# Altium PCB PCB1.PcbDoc (part 1 of 2)
Units mm, origin at the board's own origin, x right, y up, seen from the top; angles counter-clockwise.
Board outline 100 x 100 mm, 2 copper layers (Top Layer, Bottom Layer); 110 components, 80 nets, 496 pads, 98 vias.
Unrouted connection lines stored in the file: 40.
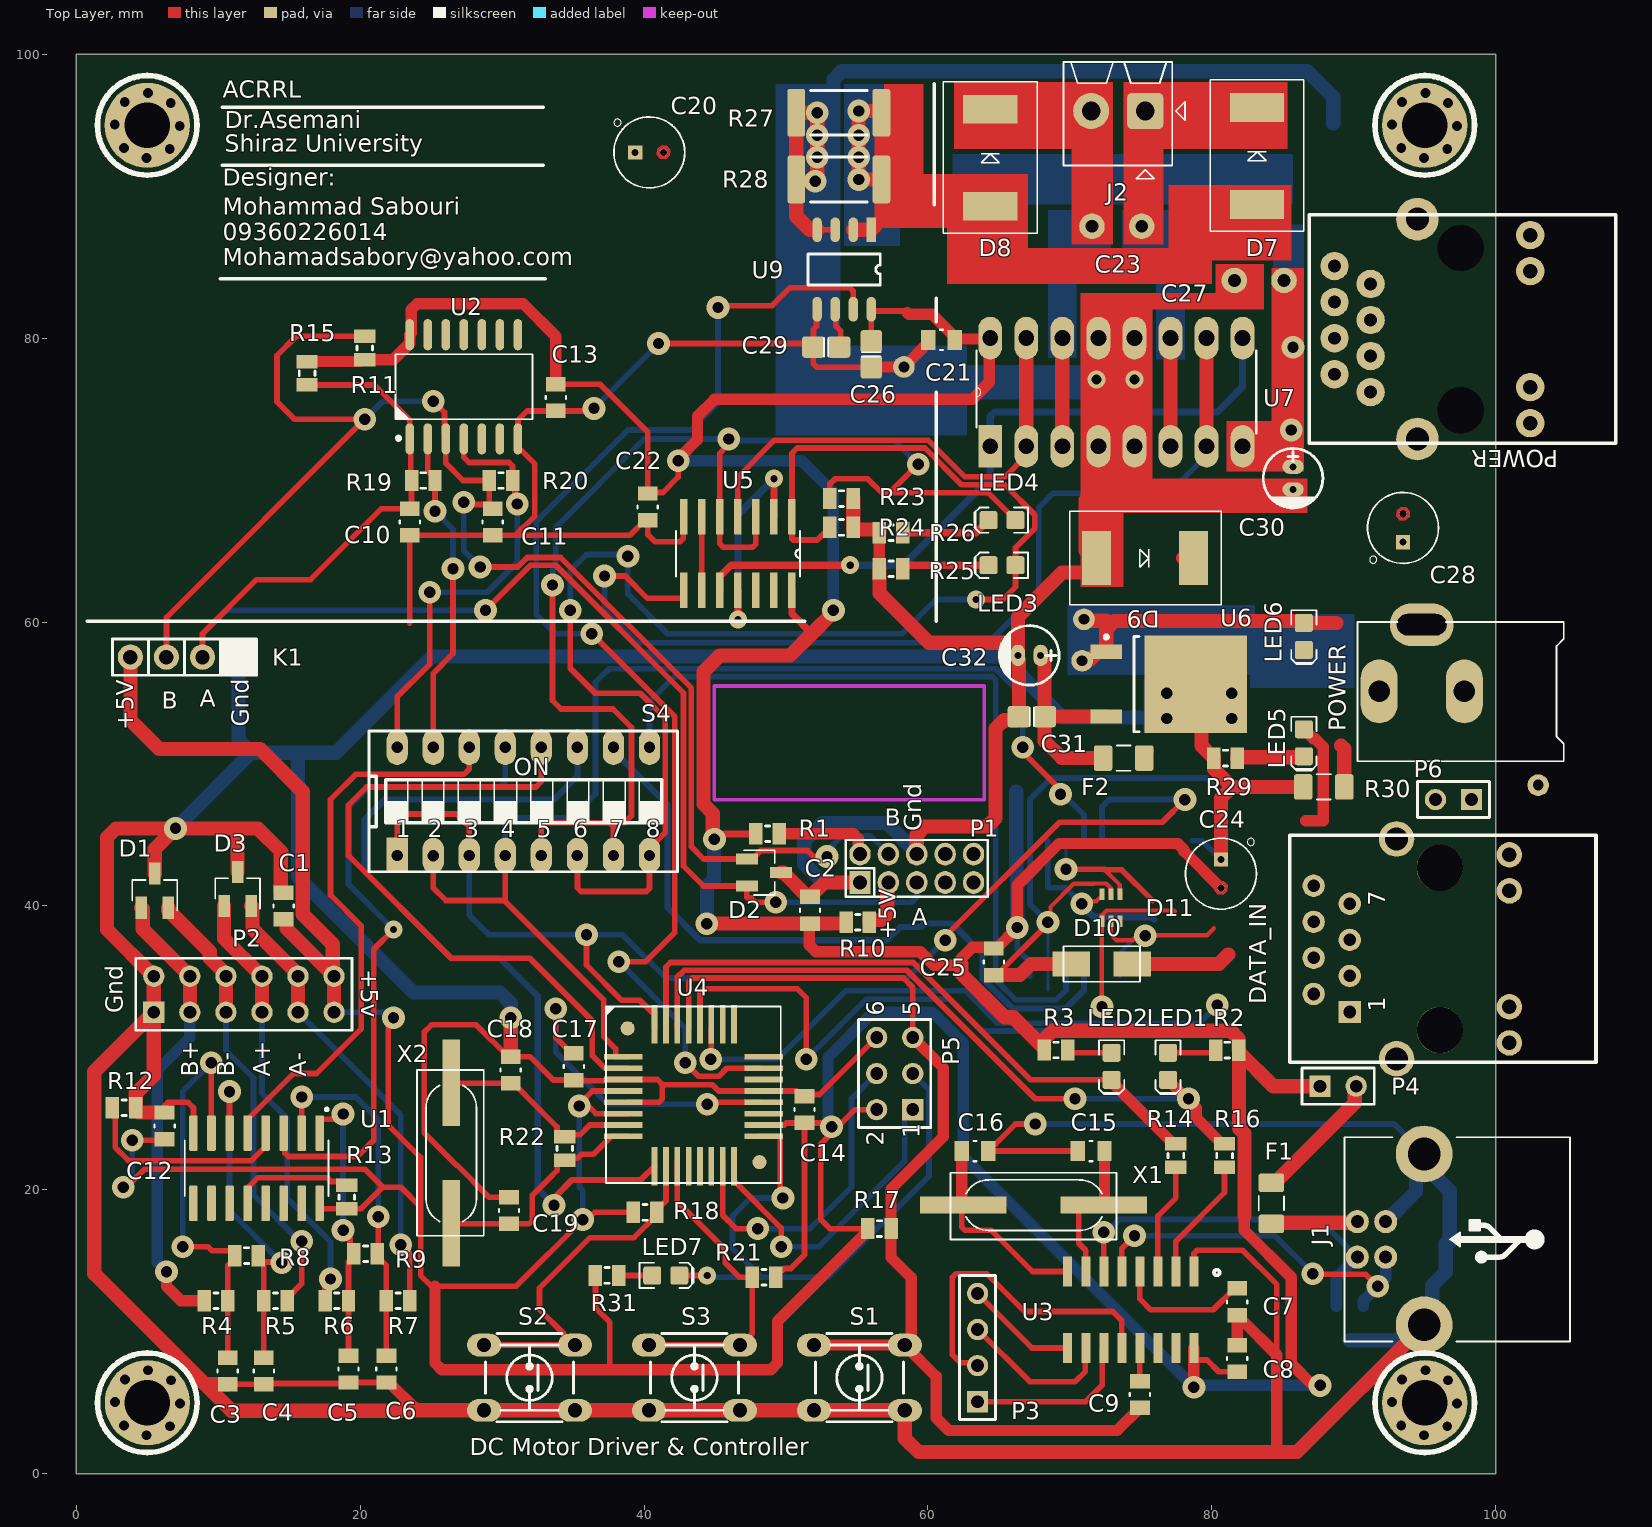
[diagram p0: Top Layer view]
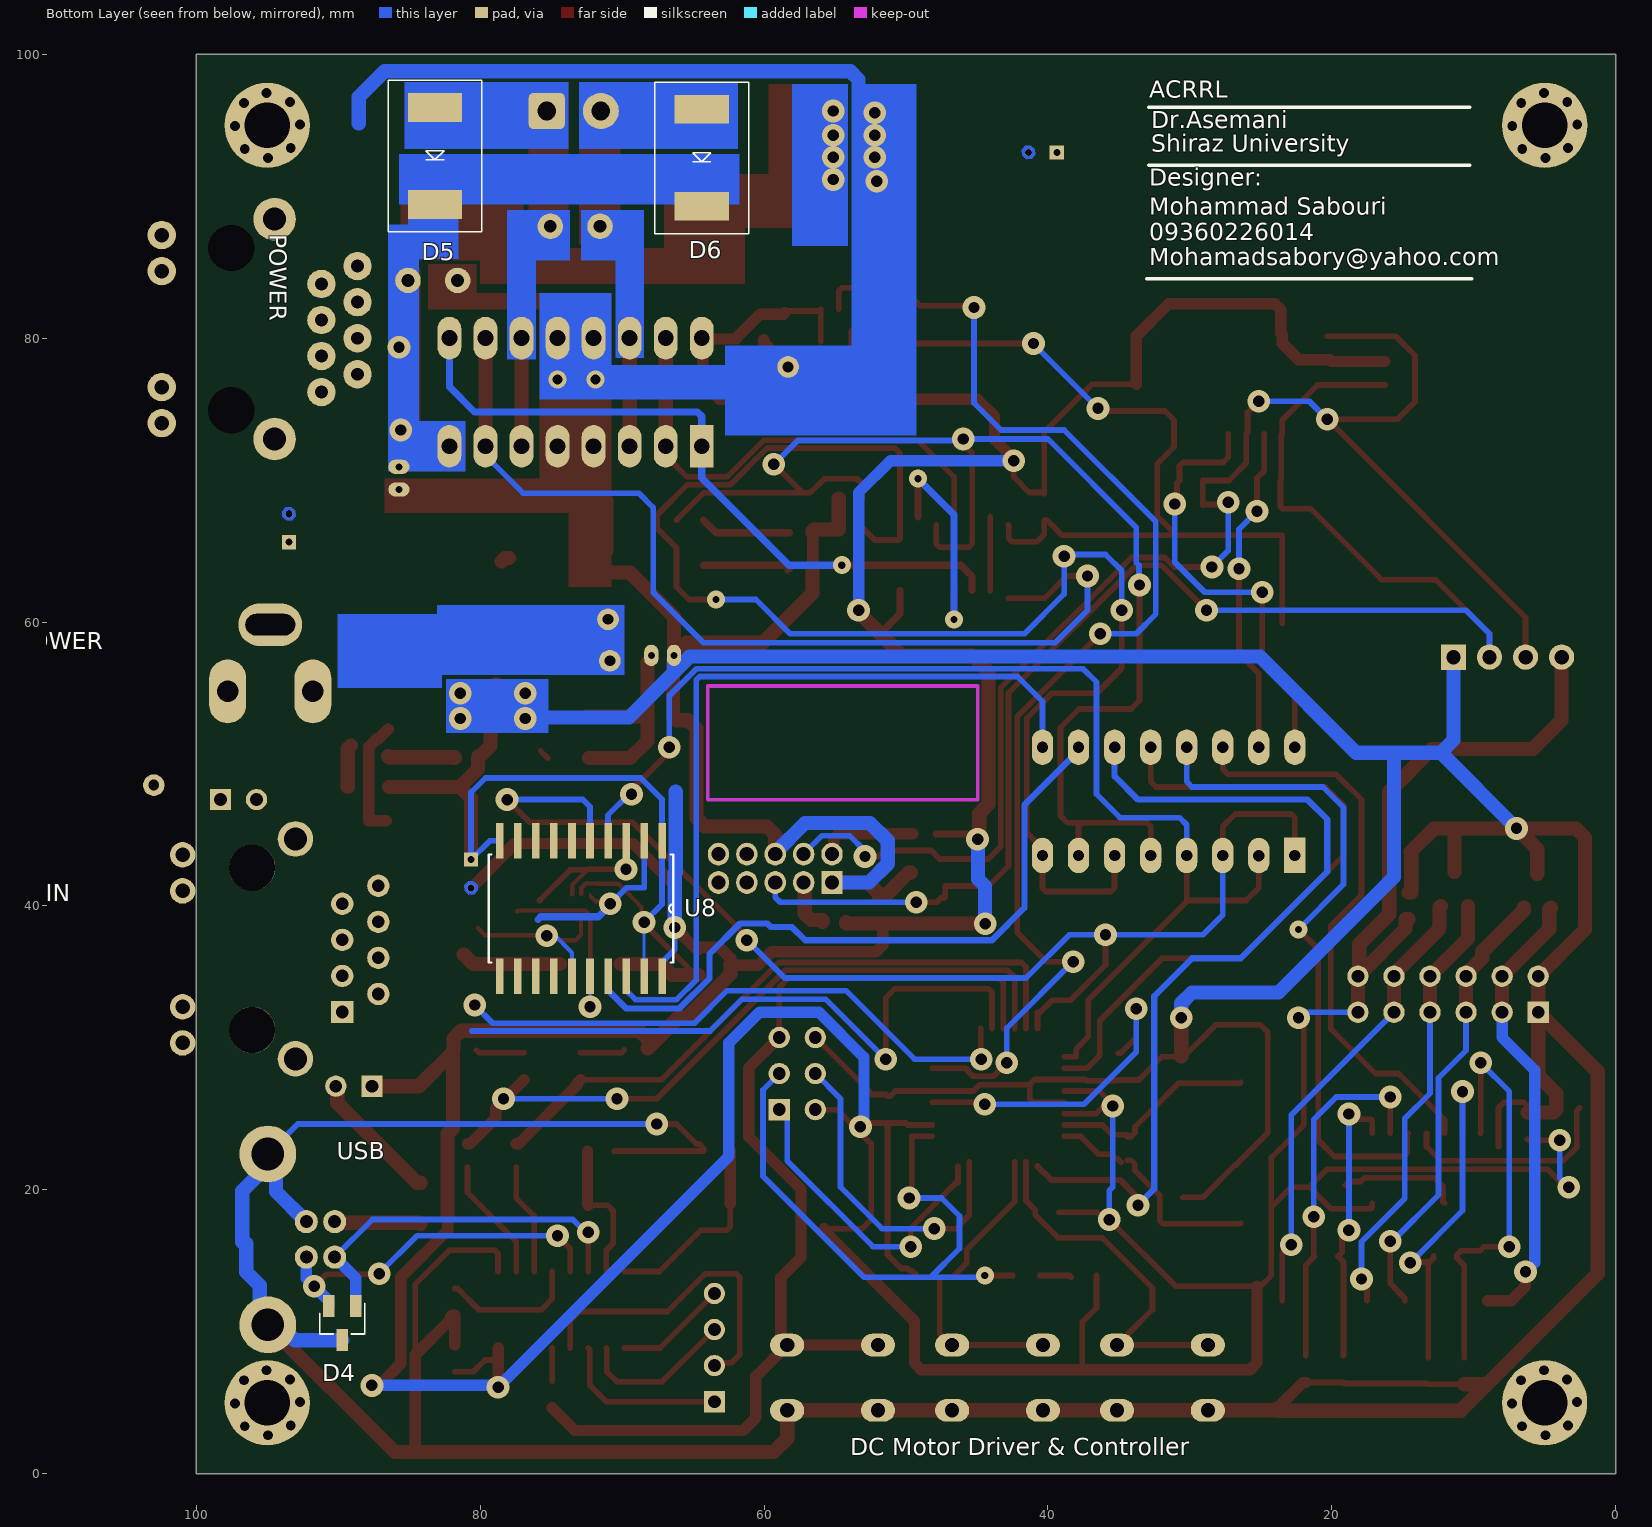
[diagram p1: Bottom Layer view, seen from below]

## Layer stack, top to bottom
Top Solder: solder mask 0.0102, Solder Resist, Dk 3.5
Top Layer: signal copper 0.0356
Dielectric 1: dielectric 0.32, FR-4, Dk 4.8
Bottom Layer: signal copper 0.0356
Bottom Solder: solder mask 0.0102, Solder Resist, Dk 3.5

## Board outline
0,0 0,100.005 100,100.005 100,0

## Design rules (kind name [scope] priority, off if disabled: settings)
Clearance [All] p1: gap=0.15 ignorepadtopadclearanceinfootprint=FALSE
PolygonConnect [All] p1: connectstyle=Relief reliefconductorwidth=0.254 reliefentries=4 polygonreliefangle="90 Angle" airgapwidth=0.254
RoutingVias [All] p1: holewidth=0.8 width=1 viastyle="Through Hole" minholewidth=0.5 minwidth=0.5 maxholewidth=1 maxwidth=1.65
SolderMaskExpansion [All] p1: expansion=0.102 istentingtop=FALSE
Width [All] p1: maxlimit=1 minlimit=0.2 preferedwidth=0.8
30 further rules are at their usual default settings.

## Components (designator, comment, footprint, x,y, rotation, side; value= is the part's Value field where it differs from the comment)
C1 "470nF 50V" 0805 14.605,40.005 r90 top value=470nF
C2 "100nF" 0805 51.689,39.7 r90 top value=470nF
C3 "22pF" 0805 10.668,7.239 r270 top value=470nF
C4 "22pF" 0805 13.208,7.239 r270 top value=470nF
C5 "22pF" 0805 19.177,7.366 r270 top value=470nF
C6 "22pF" 0805 21.844,7.366 r270 top value=470nF
C7 "100nF" 0805 81.788,12.116 r270 top value=470nF
C8 "100nF" 0805 81.788,8.128 r90 top value=470nF
C9 "100nf" 0805 74.93,5.588 r270 top value=470nF
C10 "1uF" 0805 23.495,67.056 r90 top value=470nF
C11 "1uF" 0805 29.337,67.056 r90 top value=470nF
C12 "22pF" 0805 6.223,24.511 r90 top value=470nF
C13 "100nF" 0805 33.782,75.819 r270 top value=470nF
C14 "1uF" 0805 51.308,25.654 r90 top value=470nF
C15 "22pF" 0805 71.501,22.733 r0 top value=470nF
C16 "22pF" 0805 63.322,22.733 r180 top value=470nF
C17 "100nf" 0805 35.052,28.677 r90 top value=470nF
C18 "22pF" 0805 30.607,28.448 r90 top value=470nF
C19 "22pF" 0805 30.48,18.542 r270 top value=470nF
C20 "1000u" "RADIAL - THRU 5mm" 40.37,93.091 r0 top
C21 "470nF 50V" 0805 60.96,79.883 r180 top value=470nF
C22 "22nF 50V" 0805 40.259,68.123 r270 top value=470nF
C23 "100nF" "CAP Ceramic 3.5mm" 75.057,87.884 r180 top
C24 "1000u" "RADIAL - THRU 5mm" 80.645,42.275 r270 top
C25 "470nF 50V" 0805 64.643,36.068 r90 top value=470nF
C26 "approved sub OK" CAPC2012X135N 56.007,78.867 r90 top value=0.1µ
C27 "330pF" "CAP Ceramic 3.5mm" 81.59,84.074 r0 top
C28 "1000u" "RADIAL - THRU 5mm" 93.472,66.635 r90 top
C29 "approved sub OK" CAPC2012X135N 52.832,79.375 r180 top value=1n8
C30 "0.1uF" "cap 00" 85.725,70.142 r90 top
C31 "approved sub OK" CAPC2012X135N 67.321,53.34 r180 top value=0.1µ
C32 "0.3uF" "cap 00" 67.145,57.658 r0 top
D1 "SM712" PCBComponent_1#1 4.577,39.878 r90 top
D2 "SM712" PCBComponent_1#2 47.244,41.407 r0 top
D3 "SM712" PCBComponent_1#1 10.414,40.005 r90 top
D4 "SM712" PCBComponent_1#2 90.673,11.811 r270 bottom
D5 "SMCJ120CA" DIODE-SMC 83.185,96.766 r90 bottom
D6 "SMCJ120CA" DIODE-SMC 64.389,96.639 r90 bottom
D7 "SMCJ120CA" DIODE-SMC 83.185,88.932 r270 top
D8 "SMCJ120CA" DIODE-SMC 64.389,88.805 r270 top
D9 "SMCJ120CA" DIODE-SMC 71.382,64.516 r180 top
D10 "Diode 1N5819" DO-214AC 72.248,35.918 r0 top
D11 "SMF05C.TCT" SC70-6 72.898,39.878 r180 top
DATA_IN "215877-1 RJ45" HR911105A#1 89.715,32.533 r0 top
F1 "Slow-blow" RESC3216X70N 84.201,19.05 r270 top value=500mA
F2 "Slow-blow" RESC3216X70N 73.787,50.419 r0 top value=2A
J1 "USB-B" USB_TypeB_Tyco 105.241,16.51 r180 top
J2 "Stackable ScrewTerm" 2P_PCB_ScrewTerm_90S_3.81MM 75.311,96.012 r90 top value="2 position"
K1 "Encoder_Motor" HEADER-1X4 11.43,57.531 r270 top
LED1 "TX" LED-0805-K 76.915,28.702 r270 top
LED2 "RX" LED-0805-K 72.936,28.702 r270 top
LED3 "Green" LED-0805-K 65.215,64.008 r180 top
LED4 "Green" LED-0805-K 65.215,67.183 r180 top
LED5 "Red" LED-0805-K 86.487,51.498 r270 top
LED6 "Red" LED-0805-K 86.487,58.991 r270 top
LED7 "L" LED-0805-K 41.529,13.97 r0 top
P1 "Encoder motor_AB" hhh 55.214,41.656 r0 top
P2 "Encoder" HDR2X6 5.461,32.512 r0 top
P3 "Header 4" HDR1X4 63.5,5.08 r90 top
P4 "Header 2" HDR1X2 87.63,27.305 r0 top
P5 "ISP" HDR2X3 58.928,25.654 r90 top
P6 "Header 2" HDR1X2 98.298,47.498 r180 top
POWER "CONN_PWR_JACK_2.1x5.5mm" CONN_PWR_JACK_2.1x5.5mm 105.49,55.118 r270 top value="2.1mm ID, 5.5mm OD"
POWER "215877-1 RJ45" HR911105A#2 97.536,80.645 r270 top
R1 "330" "RES 0805 (2012X06L)" 49.529,45.085 r180 top
R2 "1K" "RES 0805 (2012X06L)" 81.914,29.845 r180 top
R3 "1K" "RES 0805 (2012X06L)" 68.199,29.855 r0 top
R4 "1K" "RES 0805 (2012X06L)" 9.017,12.192 r0 top
R5 "1K" "RES 0805 (2012X06L)" 14.859,12.192 r180 top
R6 "1K" "RES 0805 (2012X06L)" 17.527,12.192 r0 top
R7 "1K" "RES 0805 (2012X06L)" 21.845,12.192 r0 top
R8 "120" "RES 0805 (2012X06L)" 12.826,15.367 r180 top
R9 "120" "RES 0805 (2012X06L)" 21.209,15.494 r180 top
R10 "120" "RES 0805 (2012X06L)" 55.879,38.862 r180 top
R11 "10K" "RES 0805 (2012X06L)" 20.32,80.136 r270 top
R12 "R0" "RES 0805 (2012X06L)" 4.19,25.781 r180 top
R13 "R0" "RES 0805 (2012X06L)" 19.05,18.669 r90 top
R14 "1K" "RES 0805 (2012X06L)" 77.47,23.241 r270 top
R15 "10K" "RES 0805 (2012X06L)" 16.256,76.708 r90 top
R16 "1K" "RES 0805 (2012X06L)" 80.899,23.241 r270 top
R17 "10K" "RES 0805 (2012X06L)" 55.753,17.272 r0 top
R18 "10K" "RES 0805 (2012X06L)" 39.243,18.415 r0 top
R19 "10K" "RES 0805 (2012X06L)" 23.622,69.977 r0 top
R20 "10K" "RES 0805 (2012X06L)" 29.083,69.977 r0 top
R21 "10K" "RES 0805 (2012X06L)" 49.275,13.843 r180 top
R22 "1M" "RES 0805 (2012X06L)" 34.417,23.748 r270 top
R23 "10K" "RES 0805 (2012X06L)" 53.087,68.707 r0 top
R24 "10K" "RES 0805 (2012X06L)" 53.086,66.675 r0 top
R25 "330" "RES 0805 (2012X06L)" 58.229,63.754 r180 top
R26 "330" "RES 0805 (2012X06L)" 58.229,66.294 r180 top
R27 "Thick Film" RESC6332X70N 53.721,95.885 r180 top value=R330
R28 "Thick Film" RESC6332X70N 53.721,91.186 r180 top value=R330
R29 "330" "RES 0805 (2012X06L)" 80.138,50.419 r0 top
R30 "Thin Film" RESC3216X70N 87.884,48.387 r180 top value=4.7K
R31 "1K" "RES 0805 (2012X06L)" 36.577,13.97 r0 top
S1 "Switch PB 4Pin" SW_PB_THT_4PIN_SPDT_6X6X7 55.172,6.769 r180 top
S2 "Switch PB 4Pin" SW_PB_THT_4PIN_SPDT_6X6X7 31.931,6.769 r180 top
S3 "Switch PB 4Pin" SW_PB_THT_4PIN_SPDT_6X6X7 43.552,6.769 r180 top
S4 "DIP8" "DIP Switch x8" 22.606,43.561 r0 top
U1 "AM26LS32ACD" SOIC127P600X175-16N 12.7,21.525 r270 top
U2 "SN74LS14DR" SOIC127P780X200-14N 27.305,76.581 r90 top
U3 "CH340G" CH340G 74.295,11.557 r180 top
U4 "ATMEGA328" QFP32 38.842,29.371 r0 top
U5 "74HC04D,653" SOIC127P600X175-14N 46.609,64.821 r270 top
U6 "L7805CD2T-TR" TO252-3M 76.967,55.626 r180 top
U7 "L293N" DIP254P762X508-16 82.169,80.01 r90 top
U8 "74HC541D" SOIC127P1032X265-20N 72.898,39.827 r270 bottom
U9 "ACS712" SOIC8 56.007,87.642 r270 top
X1 "12MC" XTAL-RU49/4 72.39,18.923 r180 top
X2 "16MC" XTAL-RU49/4 26.416,17.653 r90 top

## Footprints (in the part's own frame and the unit in brackets; to place one, negate y for a bottom-side part, rotate by r counter-clockwise, add the part's x,y. Pads: shape width x height; smd on the part's side, far side on the other; paste and mask are expansions set on the pad)
2P_PCB_ScrewTerm_90S_3.81MM [mil] "TERM BLOCK 2POS SIDE ENT STACKABLE 3.81MM"
  rrect25% 100x100 hole 52: 1(0,0)
  round 100 hole 52: 2(0,150)
  silkscreen extent -188,-110 136,226, body extent -152,-75 136,225, height 335
0805 [mil]
  rect 40x55 smd: 1(-37,0) 2(37,0)
  silkscreen extent -4,-28 4,28, body extent -47,-28 47,28, height 24
"cap 00" [mm]
  oval 1x1.5 hole 0.5: 1(0.8,0) 2(-0.8,0)
  silkscreen extent -2.1,-2.1 2.1,2.1
"CAP Ceramic 3.5mm" [mm] "Bipolar Capacitor-Design:Ali Hafizi"
  round 1.8 hole 0.9: 1(0,0) 2(3.5,0)
CAPC2012X135N [mm] "Chip Capacitor, Body 2.0x1.2mm, EIA 0805, IPC Medium Density"
  round 0.254 on Mech15: 0(0,0)
  rrect25% 1.6x1.5 smd: 1(-0.9,0) 2(0.9,0)
  Top Layer pour cut-out: -0.675,0.7 -0.475,0.9 0.475,0.9 0.675,0.7 0.675,-0.7 0.475,-0.9 -0.475,-0.9 -0.675,-0.7
  silkscreen extent -0.15,-0.65 0.15,0.65, body extent -1.1,-0.72 1.1,0.73, height 1.34
CH340G [mm]
  rect 0.635x2.1 smd: 1(-4.445,-2.695) 2(-3.175,-2.695) 3(-1.905,-2.695) 4(-0.635,-2.695) 5(0.635,-2.695) 6(1.905,-2.695) 7(3.175,-2.695) 8(4.445,-2.695) 9(4.445,2.695) 10(3.175,2.695) 11(1.905,2.695) 12(0.635,2.695) 13(-0.635,2.695) 14(-1.905,2.695) 15(-3.175,2.695) 16(-4.445,2.695)
  silkscreen extent -6.26,-2.82 -5.86,-2.42, body extent -4.97,-3.11 5.01,3.13, height 1.58
CONN_PWR_JACK_2.1x5.5mm [mm] "Power Connector, 2.1mm ID, 5.5mm OD"
  oval 4.5x2.6 hole 1.511: 1(0,-13.7) 2(0,-7.7)
  oval 3x4.5 hole 1.511 slot 3.5 at 90 deg: 3(-4.7,-10.7)
  silkscreen extent -4.9,-15.22 4.92,-0.7, body extent -4.9,-14.1 4.5,0, height 11
DIODE-SMC [mil]
  rect 80x150 smd: A(-19.69,0) K(-288.74,0)
  silkscreen extent -365,-130 55,130, body extent -309,-118 2,118, height 84
DIP254P762X508-16 [mil]
  rect 118.11x66 hole 44: 1(-300,700)
  oval 118.11x66 hole 44: 2(-300,600) 3(-300,500) 4(-300,400) 5(-300,300) 6(-300,200) 7(-300,100) 8(-300,0) 9(0,0) 10(0,100) 11(0,200) 12(0,300) 13(0,400) 14(0,500) 15(0,600) 16(0,700)
  silkscreen extent -265,-38 -35,738
"DIP Switch x8" [mm] "Switch DIP 8 way flat slide Thru-Hole-Design:Ali Hafizi"
  rect 1.5x2.5 hole 0.8: 1(0,0)
  oval 1.5x2.5 hole 0.8: 2(2.54,-0.01) 3(5.08,0) 4(7.62,0) 5(10.16,0) 6(12.7,0) 7(15.24,0) 8(17.78,0) 9(17.78,7.62) 10(15.24,7.62) 11(12.7,7.62) 12(10.16,7.62) 13(7.62,7.62) 14(5.08,7.62) 15(2.54,7.62) 16(0,7.62)
  silkscreen extent -1.98,-1.14 19.76,8.76, body extent -1.98,-1.14 19.76,8.76, height 6.35
DO-214AC [mm]
  rect 2.65x1.75 smd: A(-2.15,0) C(2.15,0)
  silkscreen extent -2.7,-1.25 2.7,1.25
HDR1X2 [mm] "Connector; Header; 2 Position"
  rect 1.5x1.5 hole 0.9: 1(0,0)
  round 1.5 hole 0.9: 2(2.54,0)
  silkscreen extent -1.27,-1.27 3.81,1.27
HDR1X4 [mm] "Connector; Header; 4 Position"
  rect 1.5x1.5 hole 0.9: 1(0,0)
  round 1.5 hole 0.9: 2(2.54,0) 3(5.08,0) 4(7.62,0)
  silkscreen extent -1.27,-1.27 8.89,1.27
HDR2X3 [mm] "Connector; Header; 3x2 Position"
  rect 1.5x1.5 hole 0.9: 1(0,0)
  round 1.5 hole 0.9: 2(0,2.54) 3(2.54,0) 4(2.54,2.54) 5(5.08,0) 6(5.08,2.54)
  silkscreen extent -1.27,-1.27 6.35,3.81
HDR2X6 [mm] "Connector; Header; 6x2 Position"
  rect 1.5x1.5 hole 0.9: 1(0,0)
  round 1.5 hole 0.9: 2(0,2.54) 3(2.54,0) 4(2.54,2.54) 5(5.08,0) 6(5.08,2.54) 7(7.62,0) 8(7.62,2.54) 9(10.16,0) 10(10.16,2.54) 11(12.7,0) 12(12.7,2.54)
  silkscreen extent -1.27,-1.27 13.97,3.81
HEADER-1X4 [mil]
  rect 70x70 hole 40: 1(0,0)
  round 70 hole 40: 2(0,-100) 3(0,-200) 4(0,-300)
  silkscreen extent -51,-350 50,50, body extent -50,-350 50,50, height 470
hhh [mm]
  rect 1.5x1.6 hole 1: 1(0,0)
  oval 1.5x1.6 hole 1: 2(0,2) 3(2,0) 4(2,2) 5(4,0) 6(4,2) 7(6,0) 8(6,2) 9(8,0) 10(8,2)
  silkscreen extent -1,-1 9,3
HR911105A#1 [mm] "HR911105A"
  rect 1.575x1.575 hole 0.889: 1(0,0)
  round 1.575 hole 0.889: 2(-2.54,1.27) 3(0,2.54) 4(-2.54,3.81) 5(0,5.08) 6(-2.54,6.35) 7(0,7.62) 8(-2.54,8.89)
  round 1.8 hole 1.02: 9(11.25,-2.18) 10(11.25,0.36) 11(11.25,8.53) 12(11.25,11.07)
  round 2.5 hole 1.63: 13(3.3,12.19) 14(3.3,-3.3)
  round 3.25 hole 3.25 unplated: C(6.35,10.16) D(6.35,-1.27)
  silkscreen extent -4.23,-3.55 17.35,12.45, body extent -4.19,-3.49 17.21,12.39, height 13.5
HR911105A#2 [mm] "Single Port RJ45 Connector with Integrated Magnetics and LED for 10/100Base-T NIC Applications"
  round 3 hole 1.63: 0(-7.745,-3.05) 0(7.745,-3.05)
  round 2 hole 0.9: 1(4.44,-6.35) 2(3.18,-8.89) 3(1.9,-6.35) 4(0.64,-8.89) 5(-0.64,-6.35) 6(-1.9,-8.89) 7(-3.18,-6.35) 8(-4.44,-8.89)
  round 2 hole 1.02: 9(6.625,4.9) 10(4.085,4.9) 11(-4.085,4.9) 12(-6.625,4.9)
  round 0 hole 3.25: 13(-5.715,0) 13(5.715,0)
  Top Layer pour cut-out: 5.715,1.8 6.404,1.663 6.988,1.273 7.378,0.689 7.515,0 7.515,0 7.378,-0.689 6.988,-1.273 6.404,-1.663 5.715,-1.8 5.715,-1.8 5.715,-1.8 5.026,-1.663 4.442,-1.273 4.052,-0.689 3.915,0 3.915,0 4.052,0.689 4.442,1.273 5.026,1.663 5.715,1.8 5.715,1.8
  Top Layer pour cut-out: -5.715,1.8 -5.026,1.663 -4.442,1.273 -4.052,0.689 -3.915,0 -3.915,0 -4.052,-0.689 -4.442,-1.273 -5.026,-1.663 -5.715,-1.8 -5.715,-1.8 -5.715,-1.8 -6.404,-1.663 -6.988,-1.273 -7.378,-0.689 -7.515,0 -7.515,0 -7.378,0.689 -6.988,1.273 -6.404,1.663 -5.715,1.8 -5.715,1.8
  Bottom Layer pour cut-out: 5.715,1.8 6.404,1.663 6.988,1.273 7.378,0.689 7.515,0 7.515,0 7.378,-0.689 6.988,-1.273 6.404,-1.663 5.715,-1.8 5.715,-1.8 5.715,-1.8 5.026,-1.663 4.442,-1.273 4.052,-0.689 3.915,0 3.915,0 4.052,0.689 4.442,1.273 5.026,1.663 5.715,1.8 5.715,1.8
  Bottom Layer pour cut-out: -5.715,1.8 -5.026,1.663 -4.442,1.273 -4.052,0.689 -3.915,0 -3.915,0 -4.052,-0.689 -4.442,-1.273 -5.026,-1.663 -5.715,-1.8 -5.715,-1.8 -5.715,-1.8 -6.404,-1.663 -6.988,-1.273 -7.378,-0.689 -7.515,0 -7.515,0 -7.378,0.689 -6.988,1.273 -6.404,1.663 -5.715,1.8 -5.715,1.8
  silkscreen extent -8.05,-10.68 8.05,10.92, body extent -8,-10.38 8,10.92, height 2.3
LED-0805-K [mil]
  round 20 on Mech15: 0(0,0)
  rrect25% 50x50 smd: A(-37.5,0) K(37.5,0)
  Top Layer pour cut-out: -15,30 15,30 15,-30 -15,-30
  silkscreen extent -72,-35 77,35, body extent -39,-25 39,25, height 31
PCBComponent_1#1 [mil]
  rect 61.42x31.5 smd: 1(0,-74.8) 2(0,0) 3(94.48,-37.4)
  silkscreen extent -8,-100 77,25
PCBComponent_1#2 [mil]
  rect 61.42x31.5 smd: 1(0,74.8) 2(0,0) 3(94.48,37.4)
  silkscreen extent -8,-25 77,100
QFP32 [mm]
  rect 2.7x0.4 smd: 1(-0.3,0) 2(-0.3,-0.8) 3(-0.3,-1.6) 4(-0.3,-2.4) 5(-0.3,-3.2) 6(-0.3,-4) 7(-0.3,-4.8) 8(-0.3,-5.6) 17(9.6,-5.6) 18(9.6,-4.8) 19(9.6,-4) 20(9.6,-3.2) 21(9.6,-2.4) 22(9.6,-1.6) 23(9.6,-0.8) 24(9.6,0)
  rect 0.4x2.7 smd: 9(1.9,-7.7) 10(2.7,-7.7) 11(3.5,-7.7) 12(4.3,-7.7) 13(5.1,-7.7) 14(5.9,-7.7) 15(6.7,-7.7) 16(7.5,-7.7) 25(7.5,2.3) 26(6.7,2.3) 27(5.9,2.3) 28(5.1,2.3) 29(4.3,2.3) 30(3.5,2.3) 31(2.7,2.3) 32(1.9,2.3)
  round 1 smd: F1(0,2.007) F2(9.296,-7.417)
  silkscreen extent -1.52,-8.89 10.79,3.56, body extent 0.2,-7.29 9.2,1.71, height 1.4
"RADIAL - THRU 5mm" [mm] "Through Hole"
  rect 1.008x1.008 hole 0.5: NEG(-1,0)
  round 0.5 hole 0.5: POS(1,0)
  Top Layer region: 1.474,0.172 1.213,0.457 0.828,0.474 0.543,0.213 0.526,-0.172 0.787,-0.457 1.172,-0.474 1.457,-0.213
  Bottom Layer region: 1.474,0.172 1.213,0.457 0.828,0.474 0.543,0.213 0.526,-0.172 0.787,-0.457 1.172,-0.474 1.457,-0.213
  Multi-Layer region: 1.474,0.172 1.213,0.457 0.828,0.474 0.543,0.213 0.526,-0.172 0.787,-0.457 1.172,-0.474 1.457,-0.213
  silkscreen extent -2.5,-2.5 2.5,2.5
"RES 0805 (2012X06L)" [mm] "Chip Resistor, 2-Leads, Body 2.0x1.3mm, IPC High Density _ (0.100 W)"
  rect 0.95x1.5 smd: 1(0,0) 2(1.65,0)
  silkscreen extent 0.67,-0.55 0.97,0.55, body extent -0.19,-0.63 1.84,0.64, height 0.6
RESC3216X70N [mm] "Chip Resistor, Body 3.2x1.6mm, EIA 1206, IPC Medium Density"
  round 0.508 on Mech15: 0(0,0)
  rrect25% 1.3x1.8 smd: 1(-1.45,0) 2(1.45,0)
  silkscreen extent -0.51,-0.89 0.51,0.89, body extent -1.62,-0.82 1.63,0.83, height 0.69
RESC6332X70N [mm] "Chip Resistor, Body 6.3x3.2mm, 2512, IPC Medium Density"
  round 1 on Mech15: 0(0,0)
  rrect25% 1.25x3.35 smd: 1(-3,0) 2(3,0)
  silkscreen extent -2,-1.58 2,1.58, body extent -3.3,-1.7 3.3,1.7, height 0.69
SC70-6 [mm]
  rect 0.35x0.8 smd paste-1 mask+0: 1(-0.65,-0.95) 2(0,-0.95) 3(0.65,-0.95) 4(0.65,0.95) 5(0,0.95) 6(-0.65,0.95)
SOIC8 [mm]
  rect 1.75x0.65 smd: 1(0,0)
  oval 1.75x0.65 smd: 2(0,-1.27) 3(0,-2.54) 4(0,-3.81) 5(5.6,-3.81) 6(5.6,-2.54) 7(5.6,-1.27) 8(5.6,0)
  silkscreen extent 1.71,-4.44 3.89,0.64
SOIC127P600X175-14N [mil]
  rect 98.43x21 smd: 1(-102,150) 2(-102,100) 3(-102,50) 4(-102,0) 5(-102,-50) 6(-102,-100) 7(-102,-150) 8(102,-150) 9(102,-100) 10(102,-50) 11(102,0) 12(102,50) 13(102,100) 14(102,150)
  silkscreen extent -63,-172 63,172, body extent -118,-170 118,170, height 69
SOIC127P600X175-16N [mm]
  rrect25% 2.5x0.6 smd: 1(-2.475,4.445) 2(-2.475,3.175) 3(-2.475,1.905) 4(-2.475,0.635) 5(-2.475,-0.635) 6(-2.475,-1.905) 7(-2.475,-3.175) 8(-2.475,-4.445) 9(2.475,-4.445) 10(2.475,-3.175) 11(2.475,-1.905) 12(2.475,-0.635) 13(2.475,0.635) 14(2.475,1.905) 15(2.475,3.175) 16(2.475,4.445)
  silkscreen extent -4.24,-5.06 1.95,5.06, body extent -3,-4.95 3,4.95, height 1.75
SOIC127P780X200-14N [mm] "SOIC, 14 Leads, Body 10.5x5.3mm, Pitch 1.27mm, IPC Medium Density"
  round 1 on Mech15: 0(0,0)
  oval 2.2x0.6 smd: 1(-3.67,3.81) 2(-3.67,2.54) 3(-3.67,1.27) 4(-3.67,0) 5(-3.67,-1.27) 6(-3.67,-2.54) 7(-3.67,-3.81) 8(3.67,-3.81) 9(3.67,-2.54) 10(3.67,-1.27) 11(3.67,0) 12(3.67,1.27) 13(3.67,2.54) 14(3.67,3.81)
  silkscreen extent -3.75,-4.83 2.29,4.83, body extent -3.9,-5.25 3.9,5.25, height 2
SOIC127P1032X265-20N [mil]
  rect 98.43x21 smd: 1(-188,225) 2(-188,175) 3(-188,125) 4(-188,75) 5(-188,25) 6(-188,-25) 7(-188,-75) 8(-188,-125) 9(-188,-175) 10(-188,-225) 11(188,-225) 12(188,-175) 13(188,-125) 14(188,-75) 15(188,-25) 16(188,25) 17(188,75) 18(188,125) 19(188,175) 20(188,225)
  silkscreen extent -150,-256 150,256
SW_PB_THT_4PIN_SPDT_6X6X7 [mm] "SWITCH, PUSHBUTTON, THD, SPDT, 6X6X7.0 mm Height ; 1,000,000 cycles ; 0.98N Force, SKHHBVA010"
  oval 2.4x1.6 hole 1 mask+0.1: 1(-3.2,2.3) 2(-3.2,-2.3) 3(3.2,-2.3) 4(3.2,2.3)
  silkscreen extent -3.1,-3.1 3.1,3.1, body extent -3.95,-3.1 3.95,3.1, height 7.03
TO252-3M [mm] "D-PAK, 4-Leads, Body 6.1x6.5mm, Pitch 2.28mm, Lead Span 9.7mm, IPC Low Density"
  rect 2.2x1 smd: 1(4.4,-2.28) 3(4.4,2.28)
  rect 7.2x6.85 smd: 2(-1.9,0)
  silkscreen extent 2.1,-3.45 4.52,3.35, body extent -3.75,-3.35 2.45,3.35, height 2.38
USB_TypeB_Tyco [mm]
  round 1.626 hole 0.914: 1(14.99,-1.25) 2(14.99,1.25) 3(12.99,1.25) 4(12.99,-1.25)
  round 4 hole 2.3: MH(10.28,6.02) MH(10.28,-6.02)
  silkscreen extent 0,-7.2 15.9,7.2, body extent 0,-7.19 15.7,7.19, height 11.5
XTAL-RU49/4 [mil]
  rect 240x47.24 smd: 1(0,0) 2(390,0)
  silkscreen extent -35,-90 425,95, body extent -78,-90 468,95, height 120

## Part data
C1 C2 C3 C4 C5 C6 C7 C8 C9 C10 C11 C12 C13 C14 C15 C16 C17 C18 C19 C21 C22 C25: library part "CAP 470nF 50V", "CAP CER 0.1UF 50V X7R 0805", Package=0805, Rating=50V, Tolerance=10%
C20 C24 C28: library part "CAP POL 1000uF TH", "NICHICON   UVR1E102MPD1TD   ALUMINUM ELECTROLYTIC CAPACITOR, 1000UF, 25V, 20%, RADIAL, FULL REEL", Capacitance=1mF, Case/Package=Radial, Dielectric Material=Aluminium, Leakage Current=750uA, Manufacturer=Nichicon, Manufacturer Part Number=UVR1E102MPD1TD, Max Operating Temperature=85°C, Min Operating Temperature=-40°C, Package Quantity=500, Ripple Current=960mA, Supplier Part Number 1=493-5913-1-ND, Tolerance=20%, Voltage=25V, Category="Aluminum Electrolytic Capacitors", ComponentLink1Description=https://datasheet.ciiva.com/7851/e-vr-7851718.pdf?src-supplier=Element14, ComponentLink1URL=https://datasheet.ciiva.com/7851/e-vr-7851718.pdf?src-supplier=Element14, ComponentLink2Description=https://datasheet.ciiva.com/6300/e-vr-6300009.pdf?src-supplier=Digi-Key, ComponentLink2URL=https://datasheet.ciiva.com/6300/e-vr-6300009.pdf?src-supplier=Digi-Key, ComponentLink3Description=https://datasheet.ciiva.com/6300/e-vr-6300010.pdf?src-supplier=Digi-Key, ComponentLink3URL=https://datasheet.ciiva.com/6300/e-vr-6300010.pdf?src-supplier=Digi-Key, ComponentLink4Description=https://datasheet.ciiva.com/11684/e-vr-11684106.pdf?src-supplier=Avnet, ComponentLink4URL=https://datasheet.ciiva.com/11684/e-vr-11684106.pdf?src-supplier=Avnet, ComponentLink5Description=https://datasheet.ciiva.com/16502/e-vr-16502813.pdf?src-supplier=Future+Electronics, ComponentLink5URL=https://datasheet.ciiva.com/16502/e-vr-16502813.pdf?src-supplier=Future+Electronics, ComponentLink6Description=https://datasheet.ciiva.com/46381/1909356-46381757.pdf?src-supplier=Element14, ComponentLink6URL=https://datasheet.ciiva.com/46381/1909356-46381757.pdf?src-supplier=Element14, Diameter=10mm, Dissipation Factor=0.16%, Height=20mm, Height - Seated (Max)=0.866inch, Lead Diameter=0.6mm, Lead Free="Lead Free", Lead Pitch=5mm, Length=20mm, Life (Hours)=2000Hour, Mount="Through Hole,PCB", Number of Pins=2, Packaging="Tape and Reel", Pricing 1="1=0.58000, 10=0.40800, 100=0.26890 (USD)", Radiation Hardening=No, REACH SVHC="No SVHC", RoHS=Yes, Stock 1=43448, Supplier 1=Digi-Key, Termination=Radial, Voltage Rating=25V, Voltage Rating (DC)=25V
C23 C27: library part "CAP CERAMIC TOTAL SIZE", "CAP Ceramic Total", Designer="Ali Hafizi"
C26 C31: library part CAPC_1u_0805_X7R_16V_10%, "Capacitor SMD Cer 1uF 10% 16V X7R 0805", Manufacturer 1=Yageo, Manufacturer 2=Kemet, Manufacturer 3="Samsung Electro-Mechanics America, Inc", Manufacturer 4="TDK Corporation", Manufacturer Part Number 1=CC0805KKX7R7BB105, Manufacturer Part Number 2=C0805C105K4RACTU, Manufacturer Part Number 3=CL21B105KOFNNNE, Manufacturer Part Number 4=C2012X7R1C105K125AA, Package / Case="0805 (2012 metric)", Ratings="16V; X7R", Supplier Part Number 1=311-1365-6-ND, Temperature Coefficient=X7R, Tolerance=±10%, ComponentLink1Description=http://www.yageo.com/documents/recent/UPY-GPHC_X7R_6.3V-to-50V_8.pdf, ComponentLink1URL=http://www.yageo.com/documents/recent/UPY-GPHC_X7R_6.3V-to-50V_8.pdf, ComponentLink2Description=http://www.kemet.com/datasheets&C0805C105K4RACTU, ComponentLink2URL=http://www.kemet.com/datasheets&C0805C105K4RACTU, ComponentLink3Description=http://www.samsungsem.com/servlet/FileDownload?type=spec&file=CL21B105KOFNNNE.pdf, ComponentLink3URL=http://www.samsungsem.com/servlet/FileDownload?type=spec&file=CL21B105KOFNNNE.pdf, ComponentLink4Description=http://product.tdk.com/capacitor/mlcc/en/documents/mlcc_commercial_general_en.pdf, ComponentLink4URL=http://product.tdk.com/capacitor/mlcc/en/documents/mlcc_commercial_general_en.pdf, Material=ceramic, RoHS 1="RoHS Compliant", RoHS 2="RoHS Compliant", RoHS 3="RoHS Compliant", RoHS 4="RoHS Compliant", SCDType=spec, Supplier 1=Digi-Key, Supplier 2=Digi-Key, Supplier 3=Digi-Key, Supplier 4=Digi-Key, Supplier Part Number 2=399-1284-6-ND, Supplier Part Number 3=1276-1026-6-ND, Supplier Part Number 4=445-1358-6-ND
C29: library part CAPC_1n8_50V_0805, "Capacitor SMD Cer 1.8nF 10% 50V X7R 0805", Manufacturer 1="AVX Corporation", Manufacturer Part Number 1=08055C182KAT2A, Operating Temperature="-55°C ~ 125°C", Package / Case="0805 (2012 metric)", Ratings="50V; X7R", Supplier Part Number 1=478-1374-1-ND, Tolerance=±10%, SCDType=source*, Supplier 1=Digi-Key
C30 C32: library part Cap-Polar, "Polar Capacitor", Voltage=35V, Adding Date=1387/12/20, Designer="Saeid Jorablo", Organazation=ControTec
D1 D2 D3 D4: library part SM712.TC, "Asymmetrical TVS Diode for  Extended Common-Mode RS-485", Manufacturer=SEMTECH, Operating Temp="-55 to 125 °C", Storage Temp="-55 to 150 °C", Manufacture Part #=SM712.TC
D5 D6 D7 D8 D9: "Transient Surpression Diode TVS", Supplier Part Number 1=SMCJ120CABTR-ND, Supplier 1=Digi-Key
D10: "SS14", ComponentLink1Description="Manufacturer Link", ComponentLink1URL=http://www.irf.com/
D11: "12.5V Clamp 8A _8/20Âµs_ Ipp Tvs Diode Surface Mount SC-70-6", Package="SOT-363 Diodes Inc.", Availability=Unavailable, MF=Semtech, MP=SMF05C.TCT, Price=None, SnapEDA_Link=https://www.snapeda.com/parts/SMF05C.TCT/Semtech%20Corporation/view-part/1264306/?ref=snap
DATA_IN POWER: "Female Header, Pitch 2.54 mm, 2 x 4 Position, Height 11.5 mm, Tail Length 3 mm, -40 to 105 degC, RoHS, Tape and Reel", LED Color="Does Not Contain LED", Ratings=Cat3, Standard Package=1, Supplier Part Number 1=A105009TR-ND, 3D Model=215877-1.pdf, Category="Connectors, Interconnects", ComponentLink1Description="Manufacturer URL", ComponentLink1URL=http://www.te.com, ComponentLink2Description=Datasheet, ComponentLink2URL=https://datasheet.ciiva.com/16310/215877-1-16310656.pdf, Connector Type=Jack, Contact Finish=Gold, Contact Material="Phosphor Bronze", DatasheetVersion="Rev. AE", Dynamic Catalog="Modular Jacks", Family="Modular Connectors - Jacks", Features="Board Lock", Housing Material="Polybutylene Terephthalate (PBT)", Mounting Type="Through Hole", Number of Ports=1, Number of Positions/Contacts="8p8c (RJ45, Ethernet)", Number of Rows=1, Orientation="90° Angle (Right)", Other Names=A105009CT, PackageReference=THD, Packaging="Cut Tape (CT)", RoHS Information="215877-1 Statement of Compliance", Shielding=Unshielded, Supplier 1=Digi-Key, Supplier 2=Digi-Key, Supplier Part Number 2=A105009CT-ND, Tab Direction=Down, Termination=Solder
F1 F2: library part FUSE_160mA_1206, "Fuse 160mA 63VDC 1206 SMD", Manufacturer 1="Holly Fuse", Manufacturer Part Number 1=12T-0160L, Package / Case="1206 (3216 metric)", Ratings="160mA; 63VDC; slow-blow", SCDType=spec
J1: library part USB_TypeB, "Connector THT Type B USB connector", Manufacturer 1="TE Connectivity", Manufacturer Part Number 1=292304-1, Package / Case="R/A Type B", Supplier Part Number 1=A31725-ND, Connector Type="USB - B", SCDType=undef, Specifications="USB 2.0", Supplier 1=Digi-Key
J2: library part 2P_ScrewTerm_90S_3.81MM, "Terminal Block Screw Type THT 2-Position 3.81mm pitch", Color=Black, Manufacturer 1="Tyco Electronics", Manufacturer Part Number 1=1776113-2, Package / Case="Side Entry; 3.81mm pitch", Supplier Part Number 1=Motor, Category="Connectors Interconnects", Pitch="0.150\" (3.81mm)", Positions Per Level=2, SCDType=undef, Supplier 1=Digi-Key
K1: library part HEADER-1X4, Supplier Part Number 1=S1011E-36-ND, Supplier 1=Digi-Key
LED1 LED2 LED3 LED4 LED7: library part LED_SMD_Green_0805_6mcd, "LED, 0805 SMD, Green", Manufacturer 1=LITE-ON, Manufacturer Part Number 1=LTST-C171GKT, Package / Case=0805, Ratings="6 mcd; 569 nm", Supplier Part Number 1=160-1423-1-ND, Material=GaP, SCDType=source, Supplier 1=Digi-Key
  LED1: Color=TX
  LED2: Color=RX
  LED3 LED4: Color=Green
  LED7: Color=L
LED5 LED6: library part LED_SMD_Red_0805_6mcd, "LED 0805 SMD Red 6mcd 621nm", Manufacturer 1="Lite-On Inc", Manufacturer Part Number 1=LTST-C171EKT, Package / Case=0805, Ratings="6 mcd; 621 nm", Supplier Part Number 1=160-1422-1-ND, Color=Red, Material="GaAsP on GaP", SCDType=source, Supplier 1=Digi-Key
P1: library part "Header 5X2", "Header, 5-Pin, Dual row", LatestRevisionDate=17-Jul-2002, LatestRevisionNote="Re-released for DXP Platform.", Publisher="Altium Limited"
P2: library part "Header 6X2", "Header, 6-Pin, Dual row", LatestRevisionDate=17-Jul-2002, LatestRevisionNote="Re-released for DXP Platform.", Publisher="Altium Limited"
P3: "Header, 4-Pin", LatestRevisionDate=17-Jul-2002, LatestRevisionNote="Re-released for DXP Platform.", Publisher="Altium Limited"
P4 P6: "Header, 2-Pin", LatestRevisionDate=17-Jul-2002, LatestRevisionNote="Re-released for DXP Platform.", Publisher="Altium Limited"
P5: library part "Header 3X2", "Header, 3-Pin, Dual row", LatestRevisionDate=17-Jul-2002, LatestRevisionNote="Re-released for DXP Platform.", Publisher="Altium Limited"
POWER: "Power Connector, THT, 2.1mm ID, 5.5mm OD", Manufacturer 1="CUI Inc", Manufacturer Part Number 1=PJ-102AH, Package / Case="PCB mount", Supplier Part Number 1=CP-102AH-ND, Category=Connectors, Mounting Type="Through Hole", SCDType=undef, Supplier 1=Digi-Key
R1 R2 R3 R4 R5 R6 R7 R8 R9 R10 R11 R12 R13 R14 R15 R16 R17 R18 R19 R20 R21 R22 R23 R24 R25 R26 R29 R31: library part Resistor, "Resistor", Power="1/8 W", Tolerance=5%
R27 R28: library part RES_3K3_2512_5%, "Resistor SMD chip 3.3k Ohm 1W 5% 2512", Manufacturer 1=Vishay/Dale, Manufacturer Part Number 1=CRCW25123K30JNEG, Package / Case="2512 (6332 metric)", Ratings=1W, Supplier Part Number 1=541-3.3KXCT-ND, Tolerance=±5%, Material="Thick Film", SCDType=spec, Supplier 1=Digi-Key
R30: library part RES_91R_1206_5%, "Resistor SMD chip 91 Ohm 0.25W 5% 1206", Manufacturer 1=Yageo, Manufacturer Part Number 1=RC1206JR-0791RL, Package / Case="1206 (3216 Metric)", Ratings="1/4 W", Supplier Part Number 1=311-91ERCT-ND, Tolerance=±5%, ComponentLink1Description=http://www.yageo.com/documents/recent/PYu-RC1206_51_RoHS_L_4.pdf, ComponentLink1URL=http://www.yageo.com/documents/recent/PYu-RC1206_51_RoHS_L_4.pdf, Material="Thin Film", SCDType=spec, Supplier 1=Digi-Key
S1 S2 S3: library part SW-PB-4Pin, "Switch Push Button 4 Pin"
S4: library part "DIP Switch 8", "8 BIT DIP Switch"
U1: "Quadruple Differential Line Receivers 16-SOIC 0 to 70", Package="SOIC-16 Texas Instruments", Availability=Good, Check_prices=https://www.snapeda.com/parts/AM26LS32ACD/Texas%20Instruments/view-part/288238/?ref=eda, MF="Texas Instruments", MP=AM26LS32ACD, Price=None, Purchase-URL=https://pricing.snapeda.com/search/part/AM26LS32ACD/?ref=eda, SnapEDA_Link=https://www.snapeda.com/parts/AM26LS32ACD/Texas%20Instruments/view-part/288238/?ref=snap
U2: Package=None, Availability=Unavailable, MP=SN74LS14DR, Price=None
U4: library part ATMEGA328-TQFP32, "ATMEGA328 - TQFP", Supplier Part Number 1=ATMEGA328-AU-ND, Supplier 1=Digi-Key
U5: "Inverter IC 6 Channel 14-SO", Package="SO14-14 Nexperia USA Inc.", Availability=Good, Check_prices=https://www.snapeda.com/parts/74HC04D,653/Nexperia/view-part/1784153/?ref=eda, MF="Nexperia USA", MP=74HC04D,653, Price=None, Purchase-URL=https://pricing.snapeda.com/search/part/74HC04D,653/?ref=eda, SnapEDA_Link=https://www.snapeda.com/parts/74HC04D,653/Nexperia/view-part/1784153/?ref=snap
U7: "Bipolar Motor Driver Bipolar Parallel 16-PDIP", Package="PDIP-16 Texas Instruments", Availability=Unavailable, MF="Texas Instruments", MP=L293N, Price=None, SnapEDA_Link=https://www.snapeda.com/parts/L293N/Texas%20Instruments/view-part/4503258/?ref=snap
U8: "Buffer, Non-Inverting 1 Element 8 Bit per Element 3-State Output 20-SOIC", Package="SOIC-20 Toshiba", Availability=Unavailable, MF="Toshiba Semiconductor", MP=74HC541D, Price=None, SnapEDA_Link=https://www.snapeda.com/parts/74HC541D/Toshiba%20Semiconductor%20and%20Storage/view-part/2887736/?ref=snap
X1 X2: library part 16MC-HC49US, "16MHZ CRSYTAL HC49US", Supplier Part Number 1=815-ABLS-16.0M-T, Supplier 1=Mouser

## Free pads (board coordinates)
  round 6 hole 3.2: 2(5,95) 2(95,5) 2(95,95) ""(5.005,5)
  round 4.5 hole 3.2: 2(95,95) ""(5.005,5)
  round 1.524 hole 0.762: 14(58.306,77.978) 15(70.993,60.198) 16(70.866,57.277) 17(102.997,48.514)
  round 0 hole 0.7: 26(4.953,92.71) 26(4.958,2.71) 26(94.953,2.71) 26(94.953,92.71) 27(6.586,93.347) 27(6.591,3.347) 27(96.586,3.347) 27(96.586,93.347) 28(7.29,94.953) 28(7.295,4.953) 28(97.29,4.953) 28(97.29,94.953) 29(6.653,96.586) 29(6.658,6.586) 29(96.653,6.586) 29(96.653,96.586) 30(5.047,97.29) 30(5.052,7.29) 30(95.047,7.29) 30(95.047,97.29) 31(3.414,96.653) 31(3.419,6.653) 31(93.414,6.653) 31(93.414,96.653) 32(2.71,95.047) 32(2.715,5.047) 32(92.71,5.047) 32(92.71,95.047) 33(3.347,93.414) 33(3.352,3.414) 33(93.347,3.414) 33(93.347,93.414) 34(4.953,92.71) 34(4.958,2.71) 34(94.953,2.71) 34(94.953,92.71) 35(6.586,93.347) 35(6.591,3.347) 35(96.586,3.347) 35(96.586,93.347)

## Via types
v1: diameter 1.6, hole 0.8, Top Layer to Bottom Layer, 90 vias
v2: diameter 1.27, hole 0.5, Top Layer to Bottom Layer, 6 vias
v3: diameter 1.27, hole 0.711, Top Layer to Bottom Layer, 2 vias

## Nets (pads, with @x,y where several pads share a name; then routed paths per layer and width w, separated by ;. In a path a pad name is that pad's centre, name@x,y a point inside that pad or via, vN(x,y) a via of type N, cw(c..) or ccw(c..) an arc to the next point about the centre after c; other vN are vias at no path point)
1: C1.2 C2.2 C3.2 C4.2 C5.2 C6.2 C7.2 C8.2 C10.1 C11.1 C12.2 C13.2 C14.2 C15.1 C16.1 C17.1 C18.2 C19.1 C20.NEG C21.2 C22.2 C24.NEG C25.1 C26.1 C27.1 C28.NEG C29.2 C30.2 C31.2 C32.2 D1.3 D2.3 D3.3 D4.3 D9.A D10.A D11.2 J1.4 J1.MH K1.1 P1.1 P1.6 P2.1 P2.2 P5.6 pad. pad.2 pad.14 pad.17 pad.26 pad.27 pad.28 pad.29 pad.30 pad.31 pad.32 pad.33 pad.34 pad.35 R12.1 R23.2 R24.2 R25.2 R26.2 R27.2 R28.2 R29.1 R30.2 S1.1 S1.4 S2.1 S2.4 S3.1 S3.4 U1.8 U2.7 U3.1 U4.3 U4.5 U4.21 U5.7 U6.2 U7.4 U7.5 U7.12 U7.13 U8.1 U8.10 U8.19 U9.3 U9.4 U9.5 | length 763.8
  Top Layer w0.2: 72.823,41.323 72.823,40.903 72.873,40.853 D11.2@72.898,40.828
  Top Layer w0.3: v1@68.453,38.748 68.639,38.933 68.639,39.937 70.277,41.575 71.711,41.575 71.714,41.578 72.568,41.578 72.823,41.323 72.873,41.273 D11.2@72.873,40.853
  Top Layer w0.4: C12.2@6.223,25.928 6.457,26.162 7.874,26.162 8.255,25.781 U1.8@8.255,24 U1.8@8.255,23.05 ; C3.2@10.668,6.299 C4.2@13.208,6.299 13.271,6.363 19.113,6.363 C5.2@19.177,6.426 C6.2@21.844,6.426 ; 23.495,59.944 C10.1@23.495,66.116 C11.1@29.337,66.116 30.937,66.116 ; C19.1@30.48,19.482 29.084,19.482 26.823,21.742 26.772,21.742 24.511,24.003 24.511,31.115 25.019,31.623 28.181,31.623 30.416,29.388 C18.2@30.607,29.388 31.953,29.388 33.604,27.737 C17.1@35.052,27.737 35.103,27.686 37.276,27.686 37.361,27.771 37.692,27.771 40.936,27.771 41.284,27.423 ; v1(36.474,75.057) 36.297,74.879 C13.2@33.782,74.879 31.765,74.879 31.115,74.229 U2.7@31.115,72.911 31.115,72.329 32.305,71.139 32.305,67.484 30.937,66.116 ; U4.5@38.842,26.171 41.05,26.171 41.284,26.405 41.284,27.423 ; v1(41.021,79.629) 51.678,79.629 C29.2@51.932,79.375 ; U5.7@42.799,66.853 42.752,66.806 42.752,65.893 42.518,65.659 40.767,65.659 40.259,66.167 C22.2@40.259,67.183 40.069,67.183 39.002,66.116 30.937,66.116 ; U9.5@52.197,82.042 52.149,81.994 52.149,80.851 51.943,80.645 51.943,79.386 C29.2@51.932,79.375 ; U9.4@52.197,87.642 U9.3@53.467,87.642 ; C26.1@56.007,77.967 52.166,77.967 51.932,78.201 C29.2@51.932,79.375 ; P5.6@56.388,30.734 52.372,26.718 51.432,26.718 C14.2@51.308,26.594 51.117,26.594 50.74,26.971 45.261,26.971 44.822,27.41 41.297,27.41 41.284,27.423 ; C25.1@64.841,35.136 68.453,38.748 v1(68.453,38.862) ; v1(67.564,24.638) 66.167,24.638 64.761,23.232 64.57,23.232 64.262,22.924 C16.1@64.262,22.733 C15.1@70.561,22.733 ; U6.2@78.232,54.991 U6.2@78.867,55.626 ; U3.1@78.74,14.252 78.74,15.514 78.974,15.748 82.169,15.748 84.582,13.335 84.582,8.382
  Top Layer w0.8: C6.2@21.844,6.426 22.034,6.426 23.914,4.547 ; C26.1@56.007,77.967 56.018,77.978 pad.14@58.306,77.978 60.02,79.692 C21.2@60.02,79.883 ; R25.2@56.579,63.754 R26.2@56.579,66.294 ; C8.2@81.788,9.068 C7.2@81.788,11.176 81.978,11.176 82.086,11.068 82.086,10.878 84.582,8.382 84.582,1.905
  Top Layer w1: R12.1@4.19,25.781 4.191,26.797 5.461,28.067 P2.1@5.461,32.512 ; R12.1@4.192,25.654 4.387,25.459 6.215,25.459 C12.2@6.223,25.451 ; D1.3@5.527,42.278 5.527,44.008 v1(6.985,45.466) ; C3.2@10.668,6.299 10.66,6.307 9.06,6.307 ; D3.3@11.364,42.405 11.364,45.405 11.303,45.466 ; 14.407,43.759 14.407,40.953 14.414,40.945 C1.2@14.605,40.945 ; 14.451,43.804 12.789,45.466 11.303,45.466 ; 23.914,4.547 23.812,4.445 10.922,4.445 9.06,6.307 ; 24.106,4.469 S2.4@28.731,4.469 S2.1@35.131,4.469 S3.4@40.351,4.469 S3.1@46.752,4.469 S1.4@51.972,4.469 S1.1@58.372,4.469 58.372,2.491 59.339,1.524 85.995,1.524 J1.MH@94.961,10.49 ; C18.2@30.607,29.388 v1(30.607,32.131) ; D2.3@49.644,42.357 49.824,42.357 51.491,40.69 51.491,40.648 51.498,40.64 C2.2@51.689,40.64 51.88,40.64 51.887,40.648 51.887,40.838 52.705,41.656 P1.1@55.214,41.656 ; R27.2@50.721,96.901 R27.2@50.721,95.885 ; U9.4@52.197,87.642 51.677,87.642 50.721,88.598 R28.2@50.721,91.184 ; R24.2@54.736,66.675 54.736,66.55 54.761,66.525 56.473,66.525 56.579,66.419 R26.2@56.579,66.294 ; R24.2@54.736,66.675 R23.2@54.737,68.707 ; R25.2@56.579,63.754 56.579,62.039 60.071,58.547 65.456,58.547 66.095,57.908 C32.2@66.345,57.908 ; P1.6@59.214,43.656 59.214,45.007 59.8,45.593 64.184,45.593 64.77,46.179 64.77,52.504 65.356,53.09 66.171,53.09 C31.2@66.421,53.34 66.421,57.332 66.345,57.408 C32.2@66.345,57.658 C32.2@66.345,57.908 ; C25.1@64.643,35.128 64.651,35.136 64.841,35.136 66.491,35.136 67.273,35.918 D10.A@70.098,35.918 ; D9.A@71.153,65.059 71.151,65.061 71.12,65.024 71.12,68.58 72.009,69.469 U7.4@72.009,72.39 ; D9.A@71.771,63.492 69.461,63.492 66.345,60.376 C32.2@66.345,57.908 ; U7.4@72.138,72.261 U7.4@72.009,72.39 ; 75.135,69.088 74.549,69.674 U7.5@74.549,72.39 ; U6.2@78.867,55.626 79.27,55.223 79.27,51.287 79.988,50.569 80.113,50.569 80.113,50.444 R29.1@80.138,50.419 ; R29.1@80.163,50.394 80.163,49.646 81.422,48.387 ; C24.NEG@80.645,43.275 80.645,47.61 81.422,48.387 ; R30.2@86.434,48.387 81.422,48.387 ; P2.1@5.461,32.512 1.27,28.321 1.27,14.097 9.06,6.307 ; P2.1@5.461,32.512 P2.2@5.461,35.052 2.159,38.354 2.159,44.831 2.794,45.466 v1(6.985,45.466) ; v1(6.985,45.466) 11.303,45.466 ; R28.2@50.721,91.184 R28.2@50.721,91.186 R27.2@50.721,95.885 ; R28.2@50.721,91.184 50.846,91.059 v1(52.07,91.059) 52.07,91.132 52.197,91.259 v1(52.197,92.761) v1(52.197,94.31) v1(52.197,95.885) R27.2@50.721,95.885 ; U7.4@72.009,72.39 U7.13@72.009,80.01 U7.12@74.549,80.01 U7.5@74.549,72.39 ; U7.4@72.009,72.39 U7.5@74.549,72.39
  Bottom Layer w0.2: U8.19@68.453,34.069 U8.19@68.453,35.052 v1(68.453,38.862)
  Bottom Layer w0.4: v1(36.474,75.057) 41.021,79.604 v1(41.021,79.629) ; v1(67.564,24.638) 92.853,24.638 J1.MH@94.961,22.53 ; v1(68.453,38.862) 67.194,40.121 67.194,44.591 U8.1@67.183,44.602 67.194,44.613 67.194,47.526 68.69,49.022 79.629,49.022 80.645,48.006 C24.NEG@80.645,43.275 79.318,44.602 U8.10@78.613,44.602
  Bottom Layer w0.8: U7.13@72.009,79.348 U7.13@72.009,80.01
  Bottom Layer w1: v1(6.985,45.466) 12.319,50.8 ; K1.1@11.43,57.531 11.43,51.689 12.319,50.8 ; v1(30.607,32.131) 30.607,33.147 29.845,33.909 23.749,33.909 15.621,42.037 15.621,50.8 ; 50.292,97.282 53.213,97.282 53.348,97.417 53.348,98.22 53.934,98.806 86.741,98.806 88.551,96.996 88.551,95.123 ; P1.1@55.214,41.656 52.603,41.656 51.284,42.975 51.284,44.591 52.551,45.858 57.113,45.858 59.214,43.757 P1.6@59.214,43.656 ; C32.2@66.345,57.658 66.345,56.464 ; v1(76.835,53.213) 76.783,53.265 76.592,53.265 76.568,53.289 69.52,53.289 66.802,56.007 66.345,56.464 ; D4.3@89.723,9.411 93.071,9.411 94.15,10.49 J1.MH@94.961,10.49 95.536,11.064 95.536,13.272 96.481,14.217 96.481,16.217 96.581,16.317 96.761,16.317 96.761,19.919 94.961,21.718 J1.MH@94.961,22.53 94.387,21.956 94.387,19.896 J1.4@92.252,17.76 ; 12.319,50.8 15.621,50.8 ; 15.621,50.8 18.288,50.8 25.058,57.57 65.239,57.57 66.345,56.464
  other v1: 81.407,53.213 76.835,54.991 81.407,54.991
  other v3: 71.882,77.089 74.549,77.089
1A: C10.2 D2.2 K1.2 P1.5 R15.1 R19.1 U2.1 | length 107.1
  Top Layer w0.4: K1.2@8.89,57.531 8.89,59.182 12.7,62.992 16.51,62.992 21.514,67.996 C10.2@23.495,67.996 23.622,68.123 R19.1@23.622,69.977 23.558,70.04 23.558,73.215 23.495,73.279 23.495,74.229 21.016,76.708 R15.1@16.256,76.708 ; v1(28.829,60.833) 32.004,64.008 33.782,64.008 42.781,55.009 42.781,42.817 44.191,41.407 D2.2@47.244,41.407 47.244,40.621 47.305,40.56 47.539,40.56 47.839,40.259 v1(49.276,40.259)
  Bottom Layer w0.4: K1.2@8.89,57.531 8.89,59.182 10.541,60.833 v1(28.829,60.833) ; v1(49.276,40.259) 58.864,40.259 59.214,40.609 P1.5@59.214,41.656
2: D1.2 P2.3 P2.4 R4.1 | length 32.4
  Top Layer w0.8: v1(6.35,14.224) 6.35,13.208 7.366,12.192 8.942,12.192 R4.1@9.017,12.192
  Top Layer w1: D1.2@4.577,39.878 4.677,39.778 4.677,38.376 P2.4@8.001,35.052 P2.3@8.001,32.512
  Bottom Layer w0.8: v1(6.35,14.224) 5.715,14.859 5.715,28.448 8.001,30.734 P2.3@8.001,32.512